# EAGLE board fonte (EAGLE 9.6.2)
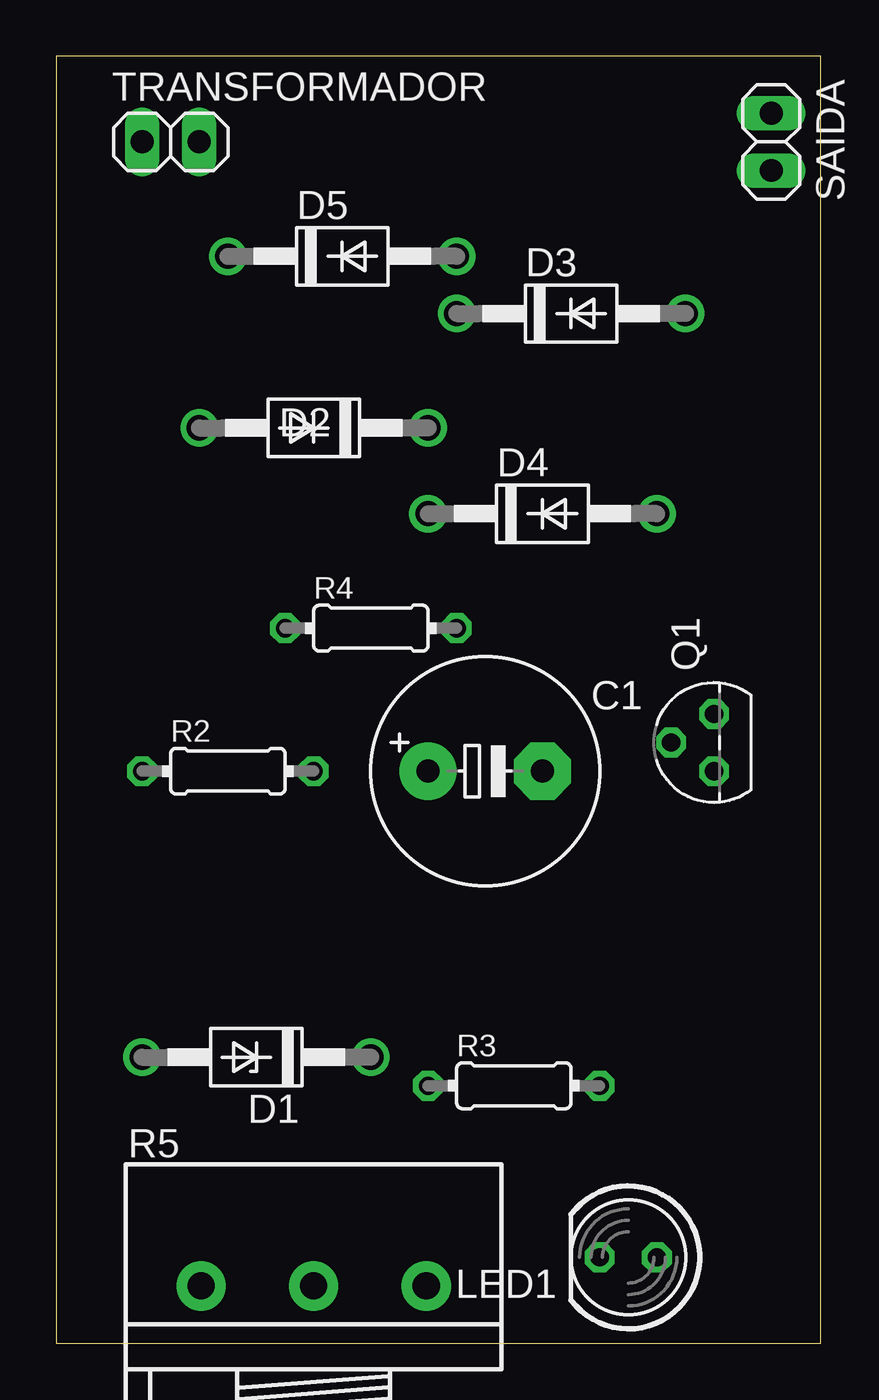
[diagram p0: board, top side]
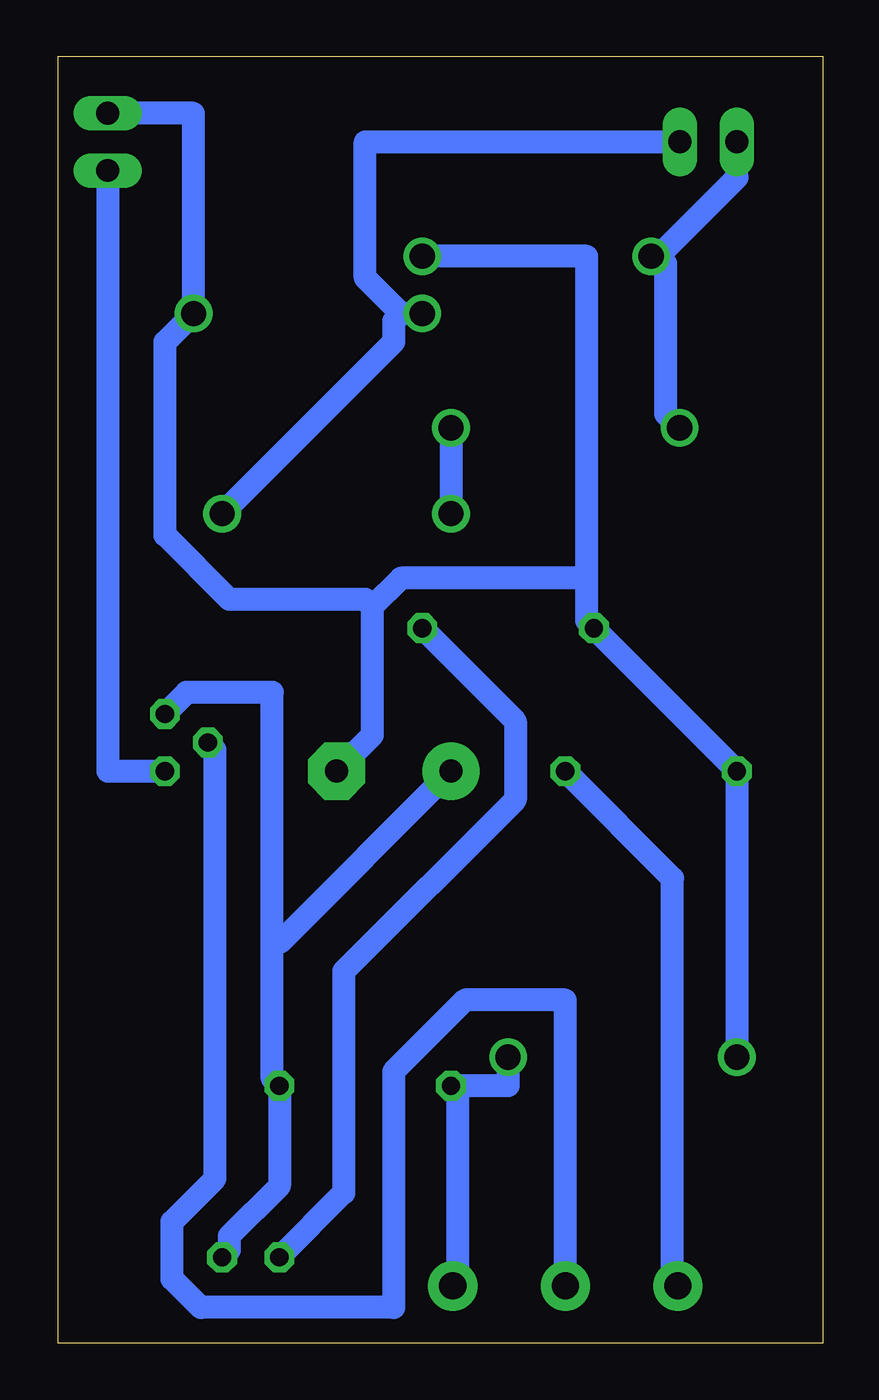
[diagram p1: board, bottom side, seen from below]

Size 33.96 x 57.14 mm. Coordinates in mm from the lower left corner, seen from the top.
Outline: 0,0 33.96,0 33.96,57.14 0,57.14 0,0
Copper layers (1*16): Top 0.035mm / dielectric 1.5mm / Bottom 0.035mm
Design rules "default *": minimum track width 40mil, minimum drill 0.35mm, track to track 40mil, track to pad 40mil, pad to pad 40mil, via to via 40mil, smd to smd 6mil, copper to edge 40mil, drill to drill 6mil, minimum pad ring 10mil, minimum via ring 8mil, stop-mask expansion 4mil, vias tented up to drill 0mil, thermal gap 10mil

## Footprints (pad centres in the part's own frame; a part is rotated, then mirrored left to right if it is on the bottom)
E5-10,5 = drill 1.016 pad 2.54: + -2.54,0 | drill 1.016 pad 2.54 octagon: - 2.54,0
DO41Z10 = drill 1.118: A 5.08,0; C -5.08,0
DO41-10 = drill 1.118: A 5.08,0; C -5.08,0
LED5MM = drill 0.813 octagon: A -1.27,0; K 1.27,0
TO92 = drill 0.813 octagon: 1 1.27,0; 2 0,1.905; 3 -1.27,0
0204/7 = drill 0.813 octagon: 1 -3.81,0; 2 3.81,0
3RP/1610N = drill 1.2 pad 2.184: 1 -5,0; 2 0,0; 3 5,0
1X02 = drill 1.016 long: 1 -1.27,0; 2 1.27,0

## Placement (x,y rotation side)
C1  470μ  [E5-10,5]  19.05,25.4 0 top
D1  1N4728  [DO41Z10]  8.89,12.7 180 top
D2  1N4004  [DO41-10]  11.43,40.64 180 top
D3  1N4004  [DO41-10]  22.86,45.72 0 top
D4  1N4004  [DO41-10]  21.59,36.83 0 top
D5  1N4004  [DO41-10]  12.7,48.26 0 top
LED1  [LED5MM]  25.4,3.81 180 top
Q1  2N3904  [TO92]  29.21,26.67 90 top
R2  2.7k  [0204/7]  7.62,25.4 0 top
R3  1k  [0204/7]  20.32,11.43 0 top
R4  1k  [0204/7]  13.97,31.75 0 top
R5  [3RP/1610N]  11.43,2.54 0 top
SAIDA  [1X02]  31.75,53.34 90 top
TRANSFORMADOR  [1X02]  5.08,53.34 0 top

## Library data of the parts
C1 = rcl; SPICEPREFIX: C
D1-D5 = diode
LED1 = led
Q1 = transistor-npn
R2-R4 = rcl; SPICEPREFIX: R
R5 = pot
SAIDA TRANSFORMADOR = pinhead

## Nets
N$1: C1.- D1.A D3.A D5.A R2.1 R4.1 SAIDA.2
N$2: C1.+ LED1.A Q1.1 R3.2
N$3: Q1.3 SAIDA.1
N$4: Q1.2 R5.2
N$5: R2.2 R5.1
N$6: D1.C R3.1 R5.3
N$7: LED1.K R4.2
N$9: D2.A D5.C TRANSFORMADOR.1
N$10: D2.C D4.C
N$11: D3.C D4.A TRANSFORMADOR.2

## Tracks (layer width: path | path; a pad name or v marks a point on that pad's centre or on a via)
N$1
  Bottom 1.016: SAIDA.2 27.94,54.61 D3.A 29.21,44.45 29.21,35.88 26.35,33.02 20.32,33.02 20,32.7 | D1.A R2.1 R4.1 10.48,32.07 10.48,33.97 | D5.A 10.48,48.26 10.48,33.97 | C1.- 20,26.99 20,32.7 | 20,32.7 18.73,33.97 10.48,33.97
N$2
  Bottom 1.016: LED1.A 26.35,4.13 26.35,4.76 24.13,6.98 R3.2 24.45,11.75 24.45,17.78 | Q1.1 28.26,28.89 24.45,28.89 24.45,17.78 | C1.+ 24.13,17.78 24.45,17.78
N$3
  Bottom 1.016: Q1.3 31.75,25.4 SAIDA.1
N$4
  Bottom 1.016: Q1.2 26.99,26.35 26.99,7.3 28.89,5.4 28.89,2.86 27.62,1.59 19.05,1.59 19.05,12.06 15.88,15.24 11.43,15.24 R5.2
N$5
  Bottom 1.016: R2.2 6.67,20.64 6.67,2.54 R5.1
N$6
  Bottom 1.016: D1.C 13.97,11.43 R3.1 16.19,11.11 16.19,2.54 R5.3
N$7
  Bottom 1.016: LED1.K 21.27,6.67 21.27,16.51 13.65,24.13 13.65,27.62 R4.2
N$9
  Bottom 1.016: TRANSFORMADOR.1 3.81,51.75 7.3,48.26 D5.C 6.99,47.94 6.99,41.28 D2.A
N$10
  Bottom 1.016: D2.C D4.C
N$11
  Bottom 1.016: TRANSFORMADOR.2 20.32,53.34 20.32,47.31 18.73,45.72 | D3.C 18.73,45.72 | D4.A 19.05,44.45 19.05,45.4 18.73,45.72